# EAGLE board collor_sensor (EAGLE 9.7.0)
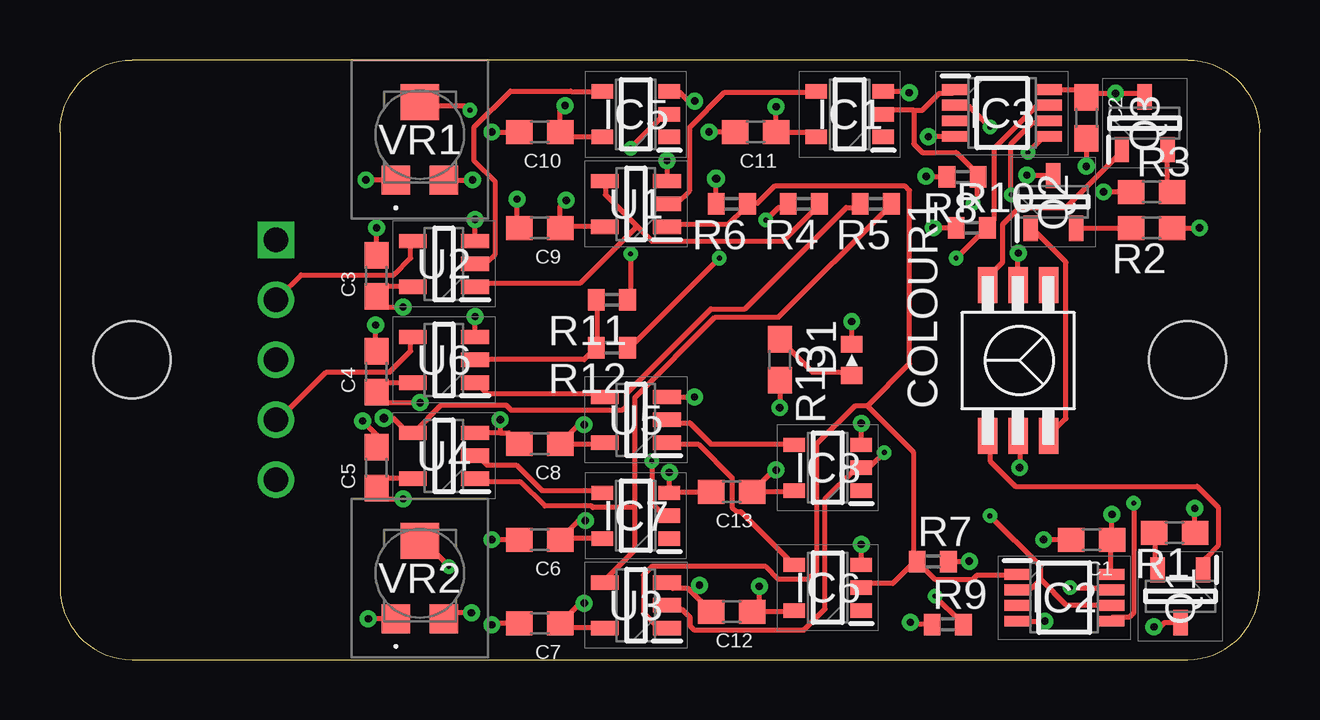
[diagram p0: board, top side]
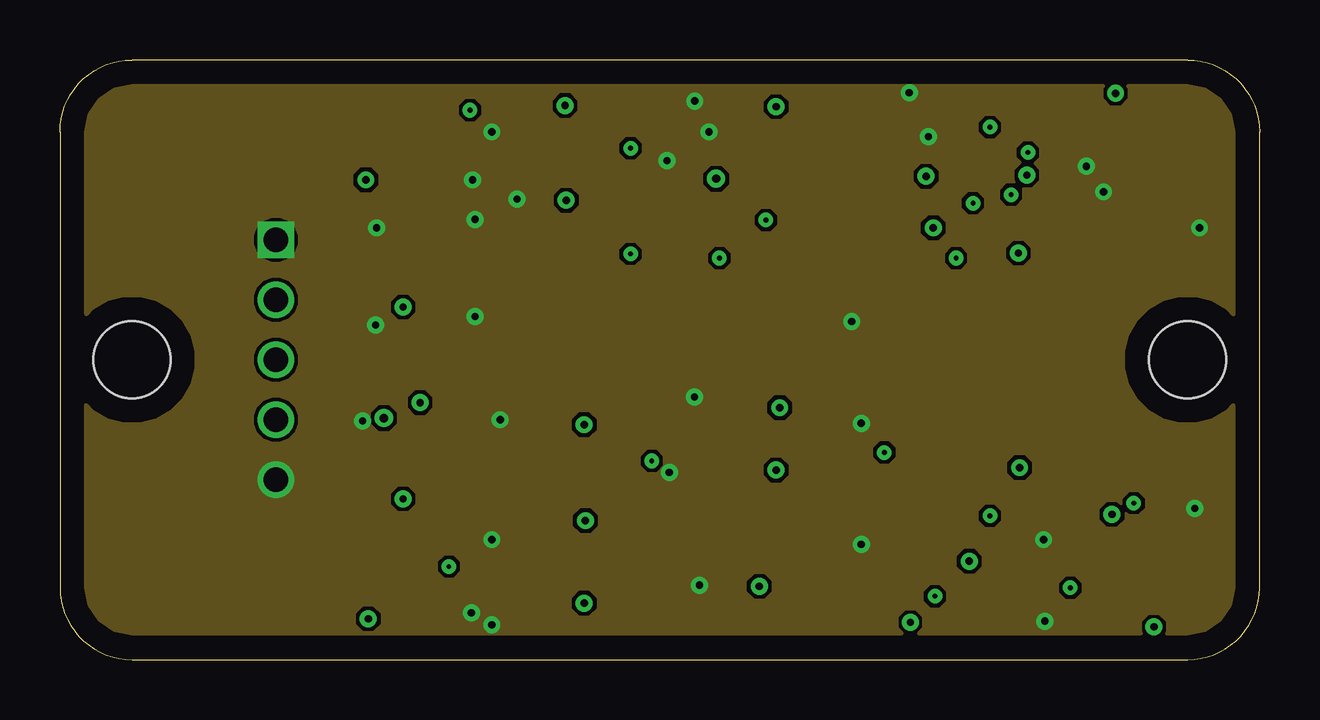
[diagram p1: board, inner layer Route2]
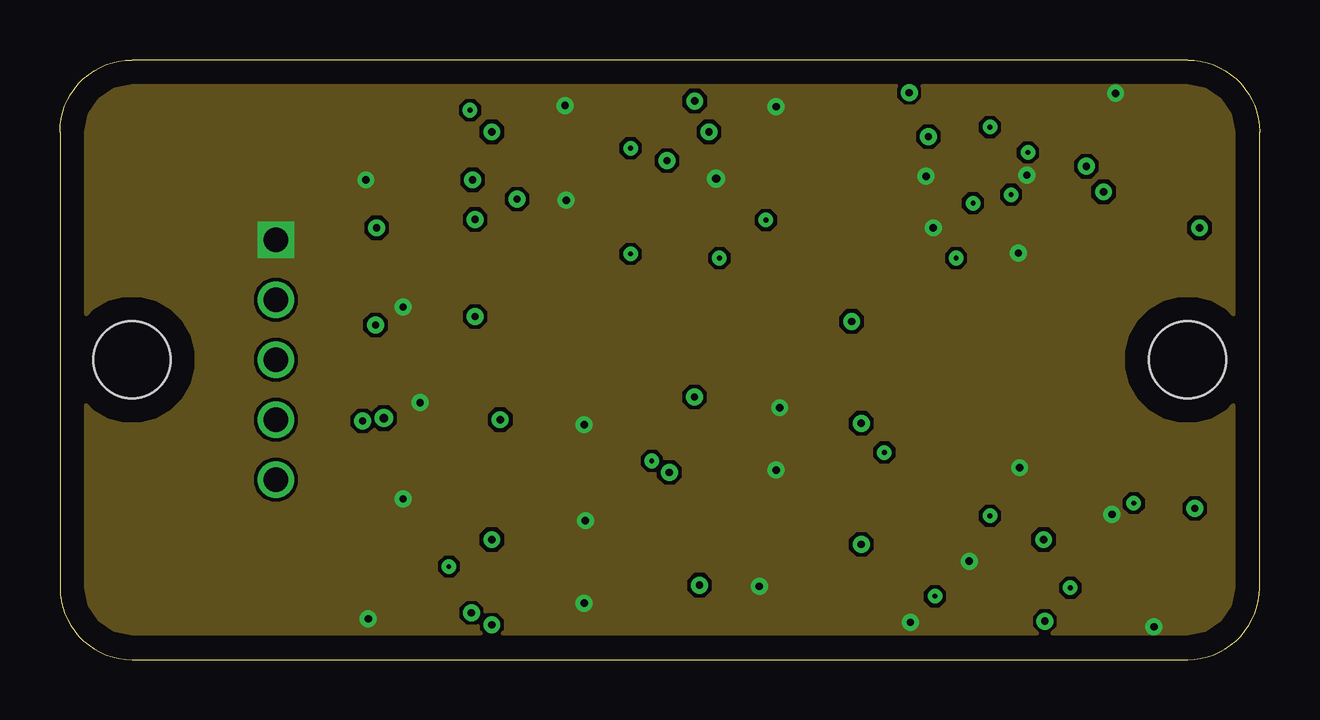
[diagram p2: board, inner layer Route63]
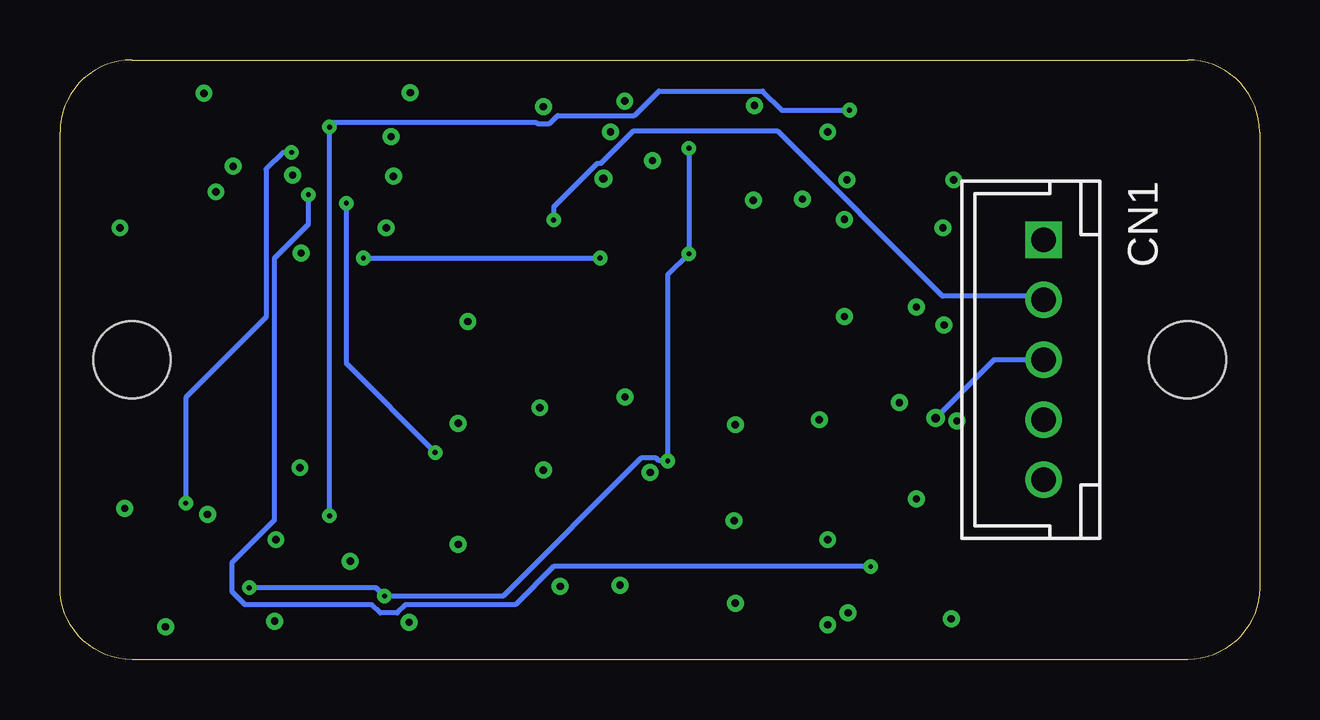
[diagram p3: board, bottom side, seen from below]

Size 50 x 25 mm. Coordinates in mm from the lower left corner, seen from the top.
Outline: 3,0 47,0 arc90 50,3 50,22 arc90 47,25 3,25 arc90 0,22 0,3 arc90 3,0
Copper layers (1+2*15+16): Top / Route2 / Route63 / Bottom
Stack-up 4 Layer Stack: Top SilkScreen Epoxy Ink / Top SolderMask SR:Green 0.0254mm Dk 4.3 / Top Surface Finish Lead-Free 0.02mm / Top CuFoil:007 0.035mm / Dielectric-1 Prepreg:001 0.064mm / Dielectric-2 Prepreg:001 0.064mm / Route2 CuFoil:007 0.035mm / Dielectric-3 Core:066 0.711mm / Route63 CuFoil:007 0.035mm / Dielectric-4 Prepreg:001 0.064mm / Dielectric-5 Prepreg:001 0.064mm / Bottom CuFoil:007 0.035mm / Bottom Surface Finish Lead-Free 0.02mm / Bottom SolderMask SR:Green 0.0254mm Dk 4.3 / Bottom SilkScreen Epoxy Ink
Design rules: minimum copper width 0.2mm, minimum drill size 0.2mm, copper clearance wire_polygon to wire_polygon 6mil, copper clearance wire_polygon to pad_smd 6mil, copper clearance wire_polygon to via 6mil, copper clearance pad_smd to pad_smd 6mil, copper clearance pad_smd to via 6mil, copper clearance via to via 6mil, copper clearance smd to pad (same net) 6mil, copper clearance smd to via (same net) 6mil, copper clearance smd to smd (same net) 6mil, dimension clearance 40mil, via restrict clearance 0mil, restrict clearance 0mil, drill distance 6mil, keepout clearance 0mil
Holes 3.2 mm at 3,12.5 47,12.5

## Footprints (pad centres in the part's own frame; a part is rotated, then mirrored left to right if it is on the bottom)
C1608 = smd 1.1 x 1: 1 -0.85,0; 2 0.85,0
B5B-XH-A = drill 1.016 square: 1 -5,0 | drill 1.016: 2 -2.5,0; 3 0,0; 4 2.5,0; 5 5,0
SOP6 = smd 1.5 x 0.8: B 3.118,1.333; CATHODE1 -3.182,0.063; CATHODE2 3.118,0.063; G -3.182,-1.207; N/C 3.118,-1.207; R -3.182,1.333
1005_LED = smd 0.7 x 0.9: A -0.65,0; C 0.65,0
SOT95P280X125-5N = smd 0.9 x 0.6: 1 -1.4,0.95; 2 -1.4,0; 3 -1.4,-0.95; 4 1.4,-0.95; 5 1.4,0.95
SOP65P400X100-8N = smd 1.1 x 0.45: 1 -1.95,0.975; 2 -1.95,0.325; 3 -1.95,-0.325; 4 -1.95,-0.975; 5 1.95,-0.975; 6 1.95,-0.325; 7 1.95,0.325; 8 1.95,0.975
SOT95P230X110-3N = smd 1.05 x 0.6: 1 -1.1,0.95; 2 -1.1,-0.95; 3 1.1,0
1005 = smd 0.7 x 0.9: 1 -0.65,0; 2 0.65,0
SOT95P285X140-5N = smd 1.15 x 0.6: 1 -1.3,0.95; 2 -1.3,0; 3 -1.3,-0.95; 4 1.3,-0.95; 5 1.3,0.95
TSRC3305103R = smd 1.2 x 1.2: 1 -1,-1.8; 3 1,-1.8 | smd 1.6 x 1.5: 2 0,1.45

## Placement (x,y rotation side)
C1  [C1608]  43,5 180 top
C2  [C1608]  42.78,22.58 270 top
C3  [C1608]  13.2,16 90 top
C4  [C1608]  13.2,12 90 top
C5  [C1608]  13.2,8 90 top
C6  [C1608]  20,5 180 top
C7  [C1608]  20,1.52 180 top
C8  [C1608]  20,9 180 top
C9  [C1608]  20,18 180 top
C10  [C1608]  20,22 180 top
C11  [C1608]  29,22 180 top
C12  [C1608]  28,2 180 top
C13  [C1608]  28,7 180 top
CN1  [B5B-XH-A]  9,12.5 270 bottom
COLOUR1  S9032-02  [SOP6]  40,12.5 90 top
D1  [1005_LED]  33,12.5 90 top
IC1  BU4SU69G2  [SOT95P280X125-5N]  32.92,22.73 180 top
IC2  NJU77242RB1  [SOP65P400X100-8N]  41.86,2.58 0 top
IC3  NJU77242RB1  [SOP65P400X100-8N]  39.27,22.78 0 top
IC5  BU4SU69G2  [SOT95P280X125-5N]  24,22.73 180 top
IC6  BU4SU69G2  [SOT95P280X125-5N]  32,3 180 top
IC7  BU4SU69G2  [SOT95P280X125-5N]  24,6 180 top
IC8  BU4SU69G2  [SOT95P280X125-5N]  32,8 180 top
Q1  MMBT3904  [SOT95P230X110-3N]  46.7,2.64 270 top
Q2  MMBT3904  [SOT95P230X110-3N]  41.4,19.08 90 top
Q3  MMBT3904  [SOT95P230X110-3N]  45.21,22.36 90 top
R1  51k  [C1608]  46.46,5.29 180 top
R2  51k  [C1608]  45.5,18 180 top
R3  51k  [C1608]  45.5,19.5 0 top
R4  none  [1005]  31,19 180 top
R5  none  [1005]  34,19 180 top
R6  none  [1005]  28,19 180 top
R7  10k  [1005]  36.38,4.09 0 top
R8  10k  [1005]  37.62,20.12 180 top
R9  10k  [1005]  37,1.47 0 top
R10  10k  [1005]  38,18 0 top
R11  0  [1005]  23,15 180 top
R12  none  [1005]  23,13 180 top
R13  [C1608]  30,12.5 270 top
U1  74AHC1G08W5-7  [SOT95P285X140-5N]  24,19 180 top
U2  74AHC1G08W5-7  [SOT95P285X140-5N]  16,16.5 180 top
U3  74AHC1G08W5-7  [SOT95P285X140-5N]  24,2.27 180 top
U4  74AHC1G08W5-7  [SOT95P285X140-5N]  16,8.5 180 top
U5  74AHC1G08W5-7  [SOT95P285X140-5N]  24,10 180 top
U6  74AHC1G08W5-7  [SOT95P285X140-5N]  16,12.5 180 top
VR1  TSR-C3305-103R  [TSRC3305103R]  15,21.78 0 top
VR2  TSR-C3305-103R  [TSRC3305103R]  15,3.5 0 top

## Library data of the parts
C1-C13 R1-R3 R13 = Robocon-RLC
CN1 = jst_XH
COLOUR1 = Robocon-Sensor
D1 R4-R12 = 1005chips
IC1 IC5-IC8 = BU4SU69G2; DESCRIPTION: General Purpose CMOS Logic IC Single Inverter Gate; HEIGHT: 1.25mm; MANUFACTURER_NAME: ROHM Semiconductor; MANUFACTURER_PART_NUMBER: BU4SU69G2; MOUSER_PART_NUMBER: N/A; MOUSER_PRICE-STOCK: https://www.mouser.co.uk/ProductDetail/ROHM-Semiconductor/BU4SU69G2?qs=W0yvOO0ixfEG9SFlSbAKZw%3D%3D
IC2 IC3 = NJU77242RB1; DESCRIPTION: Analog Comparators RtoR Open LP CMOS 6uA 840ns 6mV; HEIGHT: 1mm; MANUFACTURER_NAME: Nisshinbo; MANUFACTURER_PART_NUMBER: NJU77242RB1
Q1-Q3 = MMBT3904; DESCRIPTION: 200 MA, NPN, SI, SMALL SIGNAL TRANSISTOR; HEIGHT: 1.1mm; MANUFACTURER_NAME: NXP; MANUFACTURER_PART_NUMBER: MMBT3904
U1-U6 = 74AHC1G08W5-7; ARROW_PART_NUMBER: 74AHC1G08W5-7; ARROW_PRICE-STOCK: https://www.arrow.com/en/products/74ahc1g08w5-7/diodes-incorporated.html?utm_currency=USD&region=europe; DESCRIPTION: DiodesZetex 74AHC1G08W5-7, AND 2 Input AND Schmitt Trigger, 2 5.5 V, 5-Pin SOT-25; HEIGHT: 1.4mm; MANUFACTURER_NAME: Diodes Incorporated; MANUFACTURER_PART_NUMBER: 74AHC1G08W5-7; MOUSER_PART_NUMBER: 621-74AHC1G08W5-7; MOUSER_PRICE-STOCK: https://www.mouser.co.uk/ProductDetail/Diodes-Incorporated/74AHC1G08W5-7?qs=aOs975IaWlmWsclIlGEUSQ%3D%3D
VR1 VR2 = TSR-C3305-103R; DESCRIPTION: SMD, Trimmer Potentiometer -3mm 10k ohm +/-25% 0.15Watt; HEIGHT: 1.2mm; MANUFACTURER_NAME: Suntan Technology; MANUFACTURER_PART_NUMBER: TSR-C3305-103R

## Nets
B: COLOUR1.B Q3.1
B_ANAROGOUT: Q3.2 R3.2
B_DEF_0_S: IC3.7 R10.2 R12.1
B_DEF_O: IC2.7 IC5.2 IC7.2 R9.2 R11.1
B_DEF_P: IC2.5 IC3.5
BLUE_OUT: CN1.4 U6.4
DEF_BLUE: IC3.6 VR2.2
DEF_VAR: IC2.2 IC2.6 IC3.2 VR1.2
G: COLOUR1.G Q2.1
G_ANAROGOUT: Q2.2 R2.2
G_DEF_O: IC1.2 IC3.1 IC8.2 R8.1 U3.2
G_DEF_P: IC3.3
GND: C1.2 C2.2 C3.2 C4.2 C5.2 C6.2 C7.2 C8.2 C9.2 C10.2 C11.2 C12.2 C13.2 CN1.5 D1.C IC1.3 IC2.4 IC3.4 IC5.3 IC6.3 IC7.3 IC8.3 R1.1 R2.1 R3.1 U1.3 U2.3 U3.3 U4.3 U5.3 U6.3 VR1.3 VR2.3
N$1: R5.1 U3.4 U4.1
N$2: U5.4 U6.1
N$3: R4.1 U1.4 U2.1
N$4: IC7.4 U4.2
N$5: IC1.4 U1.2
N$6: D1.A R13.1
N$7: IC5.4 U2.2
N$8: R11.2 R12.2 U6.2
N$9: IC6.4 U5.1
N$10: IC8.4 U5.2
R: COLOUR1.R Q1.1
R_ANALOGOUT: Q1.2 R1.2
R_DEF_O: IC2.1 IC6.2 R6.1 R7.1 U1.1 U3.1
R_DEF_P: IC2.3
RED_OUT: CN1.2 R4.2 U2.4
VCC-1: C1.1 C2.1 C3.1 C4.1 C5.1 C6.1 C7.1 C8.1 C9.1 C10.1 C11.1 C12.1 C13.1 CN1.1 COLOUR1.CATHODE1 COLOUR1.CATHODE2 IC1.5 IC2.8 IC3.8 IC5.5 IC6.5 IC7.5 IC8.5 Q1.3 Q2.3 Q3.3 R6.2 R7.2 R8.2 R9.1 R10.1 R13.2 U1.5 U2.5 U3.5 U4.5 U5.5 U6.5 VR1.1 VR2.1
YELLOW_OUT: CN1.3 R5.2 U4.4

## Tracks (layer width: path | path; a pad name or v marks a point on that pad's centre or on a via)
B
  Top 0.2: Q3.1 44.23,21.14 41.94,18.85 40,18.85 39.29,18.15 39.29,16.56 38.76,16.03 38.76,15.68 COLOUR1.B
B_ANAROGOUT
  Top 0.2: Q3.2 46.16,21.14 46.16,19.73 46.34,19.56 R3.2
B_DEF_0_S  (via drill 0.2)
  Top 0.2: v27.49,16.74 23.79,13.04 R12.1 | v37.35,16.74 38.59,17.97 R10.2 38.76,18.15 38.94,18.32 38.94,21.32 40.7,23.08 41.05,23.08 IC3.7
  Bottom 0.2: v37.35,16.74 v27.49,16.74
B_DEF_O  (via drill 0.2)
  Top 0.2: v23.79,16.91 23.79,15.15 R11.1 | v23.79,21.32 25.37,22.91 IC5.2 | v24.67,8.28 24.67,6.52 25.02,6.17 25.37,6.17 IC7.2 | v36.47,2.64 37.53,1.59 R9.2 | v42.11,3 43.7,3 IC2.7
  Bottom 0.2: v23.79,21.32 v23.79,16.91 24.67,16.03 v24.67,8.28 25.02,8.28 25.15,8.41 25.78,8.41 31.54,2.64 v36.47,2.64 36.83,3 v42.11,3
B_DEF_P  (via drill 0.2)
  Top 0.2: v44.76,6.52 44.76,1.94 44.58,1.76 43.87,1.76 IC2.5 | v40.35,21.14 41.05,21.85 IC3.5
  Bottom 0.2: v44.76,6.52 44.76,10.92 41.41,14.27 41.41,20.44 40.7,21.14 v40.35,21.14
BLUE_OUT
  Top 0.2: U6.4 14.62,13.39 14.62,12.86 13.74,11.98 11.1,11.98 9.16,10.04 CN1.4
DEF_BLUE  (via drill 0.2)
  Top 0.2: v39.65,19.38 39.65,21.5 40.53,22.38 41.05,22.38 IC3.6 | v16.21,3.88 15.15,4.93 VR2.2
  Bottom 0.2: v39.65,19.38 39.65,18.15 41.05,16.74 41.05,5.82 42.82,4.05 42.82,2.82 42.29,2.29 37,2.29 36.65,1.94 35.95,1.94 35.59,2.29 31.01,2.29 29.43,3.88 v16.21,3.88
DEF_VAR  (via drill 0.2)
  Top 0.2: v38.76,22.2 37.88,23.08 37.35,23.08 IC3.2 | v38.76,5.99 40.88,3.88 40.88,3.35 | 40.88,3.35 40.53,3 40,3 IC2.2 | 40.88,3.35 41.94,2.29 43.7,2.29 IC2.6 | v17.09,22.91 16.91,23.08 15.15,23.08 VR1.2
  Bottom 0.2: v38.76,5.99 v38.76,22.2 38.56,22.41 30.16,22.41 30.1,22.34 29.6,22.34 29.26,22.68 26.06,22.68 25.04,23.71 20.71,23.71 19.91,22.91 v17.09,22.91
G
  Top 0.2: Q2.1 40.53,17.97 41.94,16.56 41.94,10.04 41.23,9.34 COLOUR1.G
G_ANAROGOUT
  Top 0.2: Q2.2 42.46,17.97 44.58,17.97 R2.2
G_DEF_O  (via drill 0.2)
  Top 0.2: 35.59,22.91 35.95,22.91 36.65,23.61 37.18,23.61 IC3.1 | 35.59,22.91 34.36,22.91 IC1.2 | 35.59,22.91 35.59,21.5 35.95,21.14 37.35,21.14 38.23,20.26 R8.1 38.23,20.09 38.23,19.21 v38.06,19.03 | U3.2 25.37,2.11 25.9,2.11 26.25,1.76 26.25,1.41 26.43,1.23 31.01,1.23 31.89,2.11 31.89,6.7 33.13,7.93 33.3,7.93 IC8.2 33.48,8.11 33.83,8.11 v34.36,8.63
  Bottom 0.2: v38.06,19.03 38.06,12.33 v34.36,8.63
GND  (via drill 0.3)
  Top 0.2: R2.1 v47.5,18 | R3.1 v43.5,19.5 | C2.2 v42.78,20.57 | IC3.4 v36.21,21.81 v36.2,21.8 | IC1.3 35.35,23.68 v35.4,23.63 | C11.2 v27.05,22 | IC5.3 25.8,23.68 26.19,23.29 v26.46,23.29 | v18,22 C10.2 | U2.3 v17.3,18.35 | C9.2 19.05,18.1 v19.05,19.2 | VR1.3 16.02,20 v17.2,20 | C3.2 v13.2,18 | v13.15,13.95 13.15,12.9 C4.2 | v17.15,1.95 16.25,1.95 VR2.3 | C7.2 18.07,1.52 v18,1.45 | C6.2 v18,5 | C8.2 18.7,9.45 18.35,9.45 | 18.35,9.45 U4.3 | U6.3 v17.3,14.3 | U5.3 v26.45,10.95 | C13.2 25.45,7 IC7.3 v25.4,7.8 | U3.3 25.55,2.97 26.18,2.97 26.35,2.8 | 26.35,2.8 C12.2 | v26.65,3.1 26.35,2.8 | C1.2 v41,5 | IC2.4 v41.05,1.6 | IC6.3 v33.4,4.8 | IC8.3 v33.4,9.85 | D1.C v33,14.1 | R1.1 v47.31,6.29 v47.3,6.3 | v25.3,20.8 U1.3 | v18.35,10 18.35,9.45 | C5.2 13.2,9.37 v12.62,9.95
  pour Route2 (no thermals): -2,25.5 -2,-1 51,-1 51,25.5
N$1
  Top 0.2: 23.96,6.34 23.96,4.58 22.73,3.35 U3.4 | 23.96,6.34 23.96,10.92 27.31,14.27 29.95,14.27 34.53,18.85 R5.1 | U4.1 17.44,7.4 19.21,7.4 20.21,6.4 22.16,6.4 22.21,6.34 23.96,6.34
N$2
  Top 0.2: U5.4 22.55,11.1 17.8,11.1 17.44,11.45 U6.1
N$3
  Top 0.2: 23.96,18.15 22.73,19.38 22.73,19.91 U1.4 | 23.96,18.15 24.67,17.44 30.13,17.44 31.54,18.85 R4.1 | 23.96,18.15 23.96,17.97 21.67,15.68 17.44,15.68 U2.1
N$4
  Top 0.2: IC7.4 22.55,7.05 20.09,7.05 19.03,8.11 17.8,8.11 17.44,8.46 U4.2
N$5
  Top 0.2: U1.2 25.37,19.03 25.73,19.03 26.25,19.56 26.25,22.2 27.71,23.66 31.49,23.66 IC1.4
N$6
  Top 0.2: D1.A 32.95,11.98 31.36,11.98 30.13,13.21 R13.1
N$7
  Top 0.2: U2.2 17.44,16.56 17.8,16.56 18.15,16.91 18.15,19.91 17.27,20.79 17.27,22.2 18.77,23.71 21.3,23.71 21.32,23.68 IC5.4
N$8
  Top 0.2: R11.2 22.38,14.98 22.38,13.04 R12.2 22.2,12.86 21.85,12.51 17.44,12.51 U6.2
N$9
  Top 0.2: IC6.4 30.48,4.05 28.37,6.17 28.19,6.17 28.02,6.34 28.02,7.58 26.61,8.99 25.37,8.99 U5.1
N$10
  Top 0.2: IC8.4 30.48,8.99 27.14,8.99 26.25,9.87 25.37,9.87 U5.2
R
  Top 0.2: Q1.1 47.75,3.88 47.75,4.23 48.28,4.76 48.28,6.34 47.4,7.22 39.82,7.22 38.76,8.28 38.76,9.16 COLOUR1.R
R_ANALOGOUT
  Top 0.2: Q1.2 45.64,3.88 45.64,5.29 R1.2
R_DEF_O
  Top 0.2: U1.1 25.37,18.15 27.84,18.15 28.54,18.85 R6.1 28.72,19.03 29.07,19.03 29.78,19.73 35.24,19.73 35.42,19.56 35.42,12.33 33.65,10.57 | IC6.2 33.48,3.17 34.71,3.17 35.59,4.05 R7.1 | IC2.1 39.82,3.52 38.23,3.52 38.06,3.35 36.47,3.35 35.77,4.05 R7.1 | 33.65,10.57 33.13,10.57 31.54,8.99 31.54,3.7 31.19,3.35 29.95,3.35 29.43,3.88 24.67,3.88 24.32,3.52 24.32,1.94 24.84,1.41 25.2,1.41 U3.1 | 33.65,10.57 35.59,8.63 35.59,4.23 R7.1
RED_OUT  (via drill 0.2)
  Top 0.2: v29.43,18.32 29.95,18.85 30.31,18.85 R4.2 | U2.4 14.62,17.44 14.62,16.74 13.92,16.03 10.04,16.03 9.16,15.15 CN1.2
  Bottom 0.2: CN1.2 9.16,15.15 13.21,15.15 20.08,22.02 26.12,22.02 27.46,20.68 27.61,20.68 29.43,18.87 v29.43,18.32
VCC-1  (via drill 0.3, 0.35)
  Top 0.2: IC3.8 42.46,23.76 C2.1 42.96,23.61 v44,23.61 45.06,23.61 Q3.3 | IC1.5 31.3,22 C11.1 v29.85,23.05 | IC5.5 21.07,21.78 C10.1 20.85,22.9 v21.05,23.1 | U1.5 20.9,18.05 C9.1 20.85,18.9 v21.1,19.15 | VR1.1 13.98,20 v12.75,20 | U2.5 13.6,15.55 C3.1 13.65,14.7 v14.3,14.7 | U6.5 13.6,11.55 C4.1 13.64,10.71 v15.01,10.71 | U4.5 13.6,7.55 C5.1 13.65,6.7 v14.3,6.7 | VR2.1 v12.85,1.7 | U3.5 21.05,1.32 C7.1 21.68,2.35 v21.85,2.35 | IC7.5 20.9,5.05 C6.1 21.64,5.79 v21.9,5.79 | U5.5 22.65,9 C8.1 21.64,9.79 v21.85,9.79 | IC6.5 30.55,2 C12.1 29.15,2.3 v29.15,3.05 | IC8.5 30.55,7 C13.1 29.75,7.9 v29.85,7.9 | R13.2 v30,10.5 | R9.1 35.53,1.47 v35.45,1.55 | R7.2 v37.89,4.09 v37.9,4.1 | IC2.8 43.81,4.96 C1.1 v43.85,6.05 | Q1.3 46.04,1.54 45.87,1.37 v45.6,1.37 | COLOUR1.CATHODE2 39.94,16.94 v39.95,16.95 | R10.1 v36.4,18 | R8.2 36.13,20.12 v36.1,20.15 | COLOUR1.CATHODE1 40,9.26 v40,8 | Q2.3 40.32,20.18 v40.3,20.2 | R6.2 v27.35,20.05
  pour Route63 (no thermals): -3,27 -3,-2 53,-2 53,27
YELLOW_OUT  (via drill 0.35)
  Top 0.2: R5.2 33.3,18.85 32.77,18.85 28.54,14.62 27.14,14.62 23.61,11.1 23.61,10.57 23.44,10.4 18.81,10.4 18.6,10.61 15.89,10.61 14.8,9.52 U4.4 14.5,9.45 13.88,10.07 v13.5,10.07
  Bottom 0.2: CN1.3 11.07,12.5 v13.5,10.07